# EAGLE board mood_ring (EAGLE 6.5.0)

Size 100 x 80 mm. Coordinates in mm from the lower left corner, seen from the top.
Outline: 0,0 100,0 100,80 0,80 0,0
Copper layers (1*16): Top 0.035mm / dielectric 1.5mm / Bottom 0.035mm
Design rules "default": minimum track width 10mil, minimum drill 24mil, track to track 8mil, track to pad 8mil, pad to pad 8mil, via to via 8mil, smd to smd 8mil, copper to edge 40mil, drill to drill 8mil, minimum pad ring 10mil, minimum via ring 8mil, stop-mask expansion 4mil, vias tented up to drill 0mil, thermal gap 10mil

## Footprints (pad centres in the part's own frame; a part is rotated, then mirrored left to right if it is on the bottom)
BATTCOM_20MM_PTH = drill 1.3: 1 20,0; 2 0,0
PLCC4 = smd 3.3 x 4.8: 1 -2,-3.35; 2 -2,2.95; 3 2,2.95; 4 2,-3.35
1X04_LOCK = drill 1.016 pad 1.88 square: 1 0,0.127 | drill 1.016 pad 1.88: 2 2.54,-0.127; 3 5.08,0.127; 4 7.62,-0.127
RS-2,5 = drill 0.813 long: 1 -1.27,0; 2 1.27,0
PW20 = smd 0.3 x 1.2: 1 -2.925,-2.9; 2 -2.275,-2.9; 3 -1.625,-2.9; 4 -0.975,-2.9; 5 -0.325,-2.9; 6 0.325,-2.9; 7 0.975,-2.9; 8 1.625,-2.9; 9 2.275,-2.9; 10 2.925,-2.9; 11 2.925,2.9; 12 2.275,2.9; 13 1.625,2.9; 14 0.975,2.9; 15 0.325,2.9; 16 -0.325,2.9; 17 -0.975,2.9; 18 -1.625,2.9; 19 -2.275,2.9; 20 -2.925,2.9

## Placement (x,y rotation side)
COIN_CELL  3V  [BATTCOM_20MM_PTH]  7.62,-55.88 0 top  (outside the outline)
D2  LED-RGB-CCSMD  [PLCC4]  3.81,-34.29 0 top  (outside the outline)
JP1  [1X04_LOCK]  1.27,-71.12 0 top  (outside the outline)
R1  THERMISTOR-2,5  [RS-2,5]  3.81,-41.91 0 top  (outside the outline)
U$2  MSP430G2XX3TSSOP  [PW20]  15.24,-19.05 0 top  (outside the outline)

## Library data of the parts
COIN_CELL D2 U$2 = ELEC327-lab2
JP1 = SparkFun
R1 = varistor

## Nets
+: COIN_CELL.1
-: COIN_CELL.2